# Altium PCB rp3a0-mini.PcbDoc
Units mm, origin at the board's own origin, x right, y up, seen from the top; angles counter-clockwise.
Board outline 60 x 21 mm, 6 copper layers (Top Layer, Mid Layer 1, Mid Layer 2, Mid Layer 3, Mid Layer 4, Bottom Layer), stack 1.597 mm thick; 65 components, 88 nets, 627 pads, 99 vias.
Unrouted connection lines stored in the file: 167.
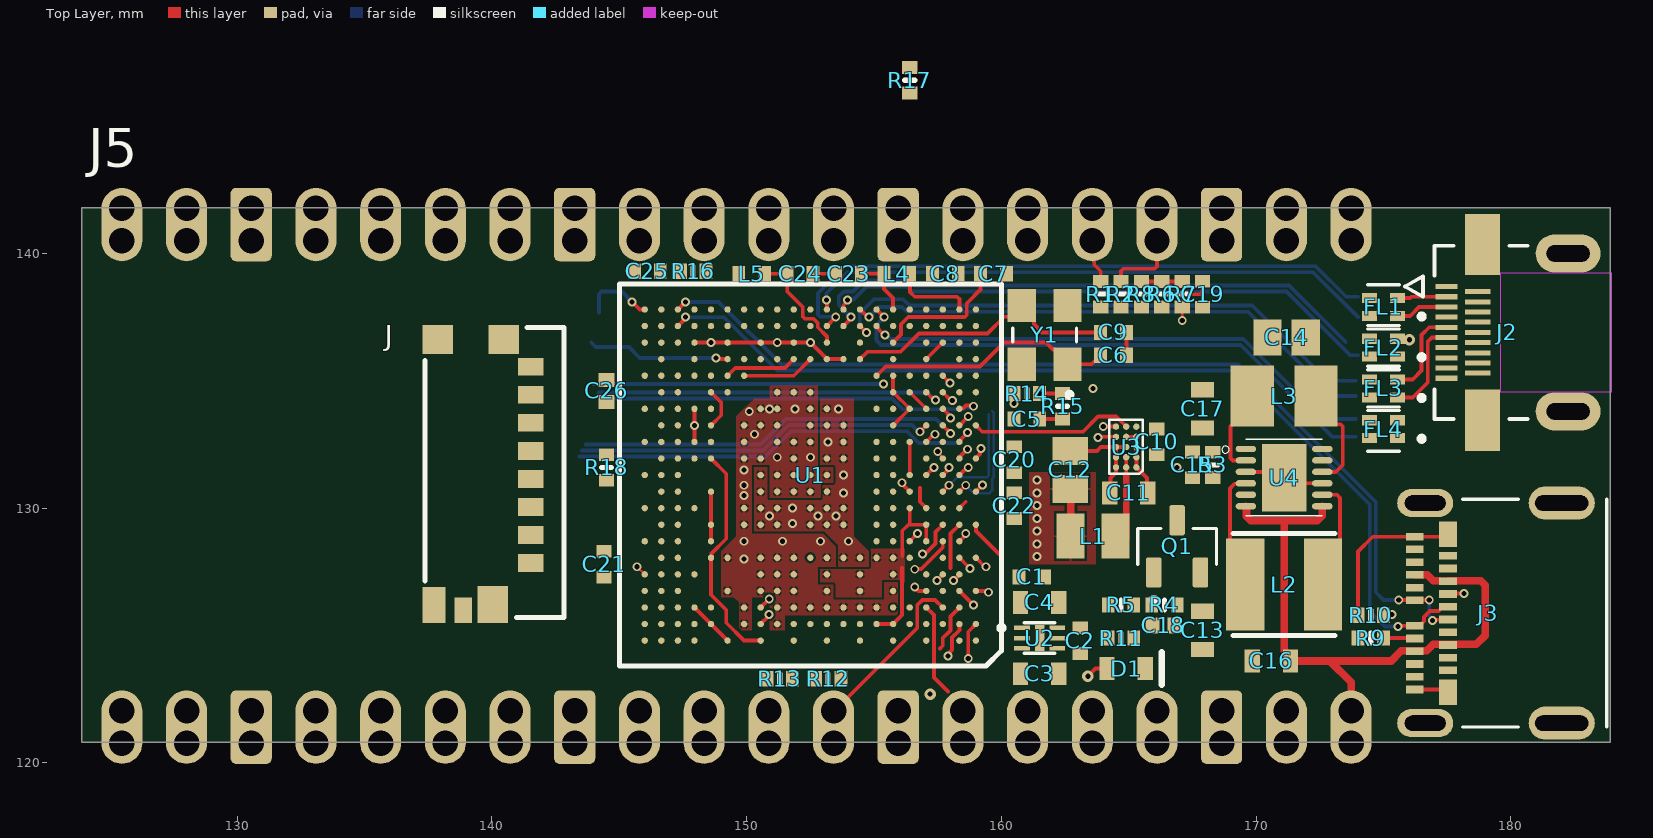
[diagram p0: Top Layer view]
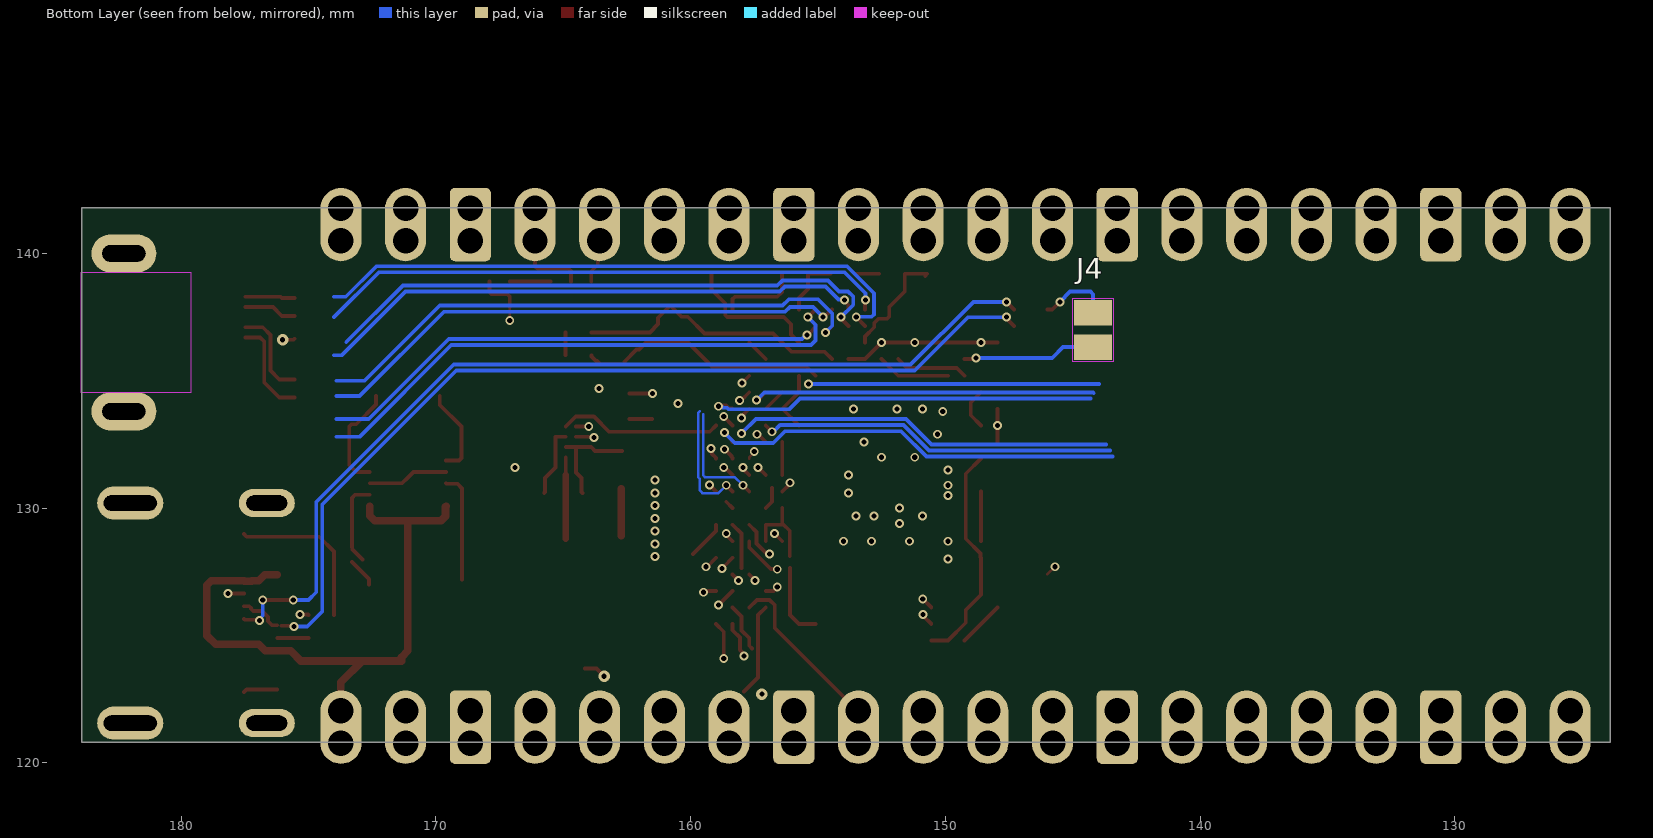
[diagram p1: Bottom Layer view, seen from below]
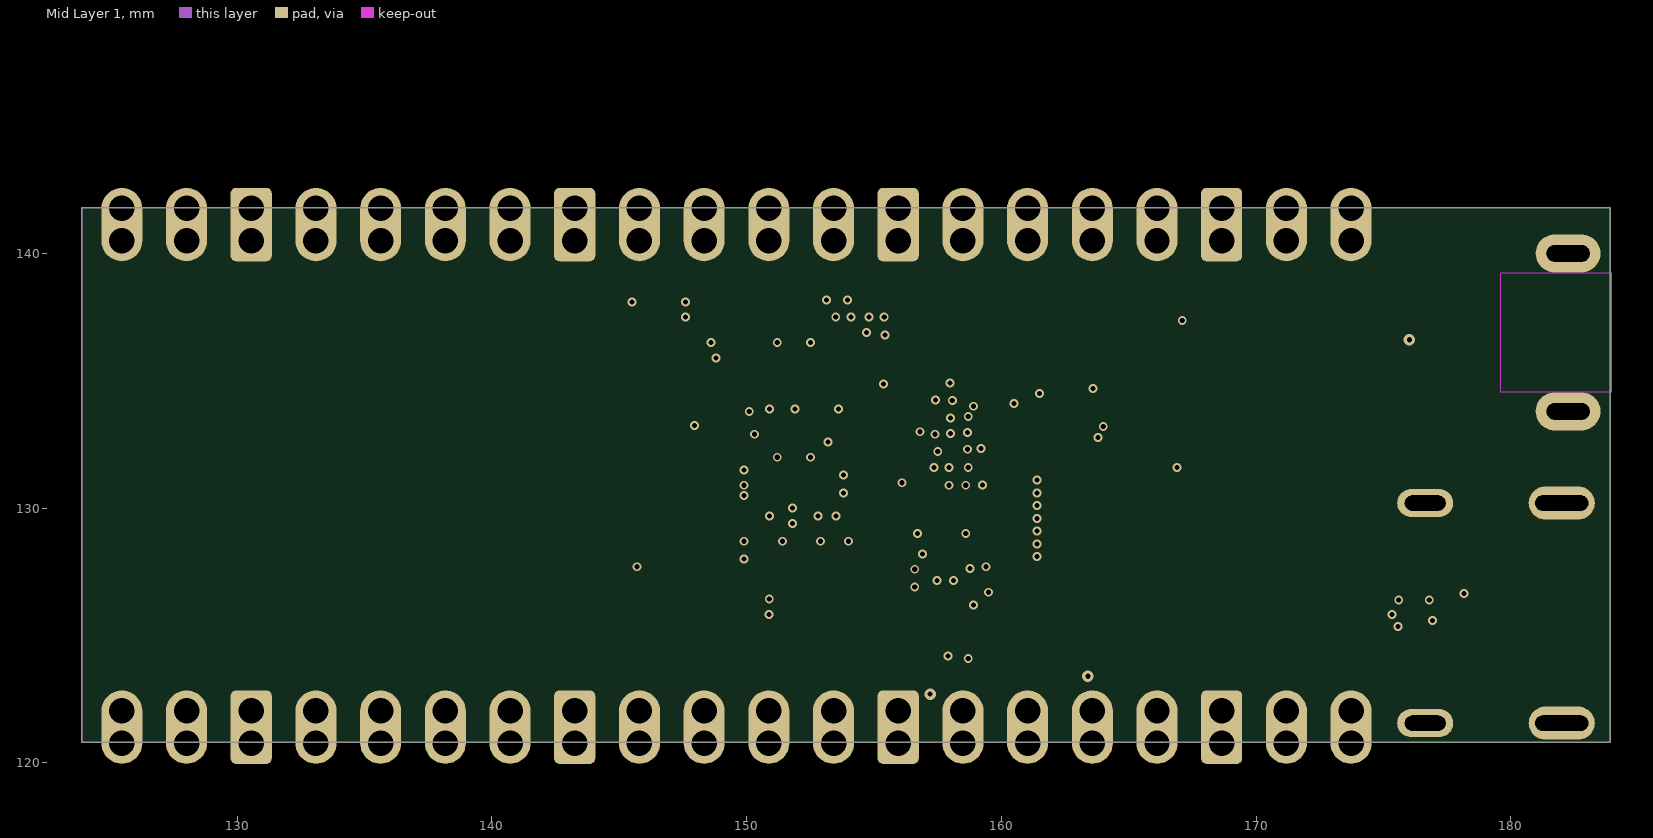
[diagram p2: Mid Layer 1]
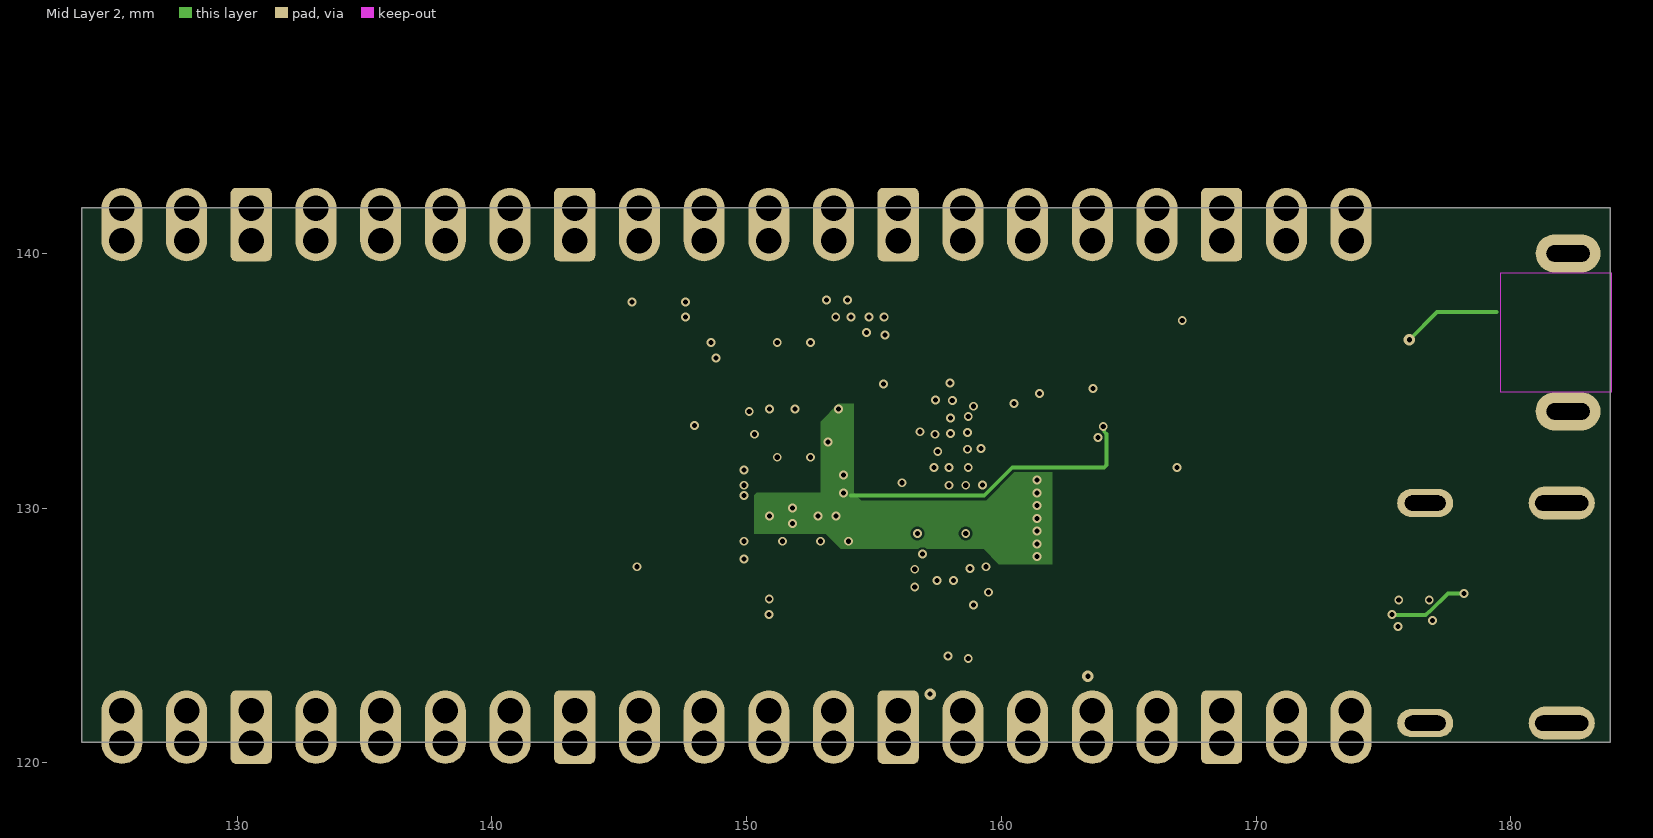
[diagram p3: Mid Layer 2]
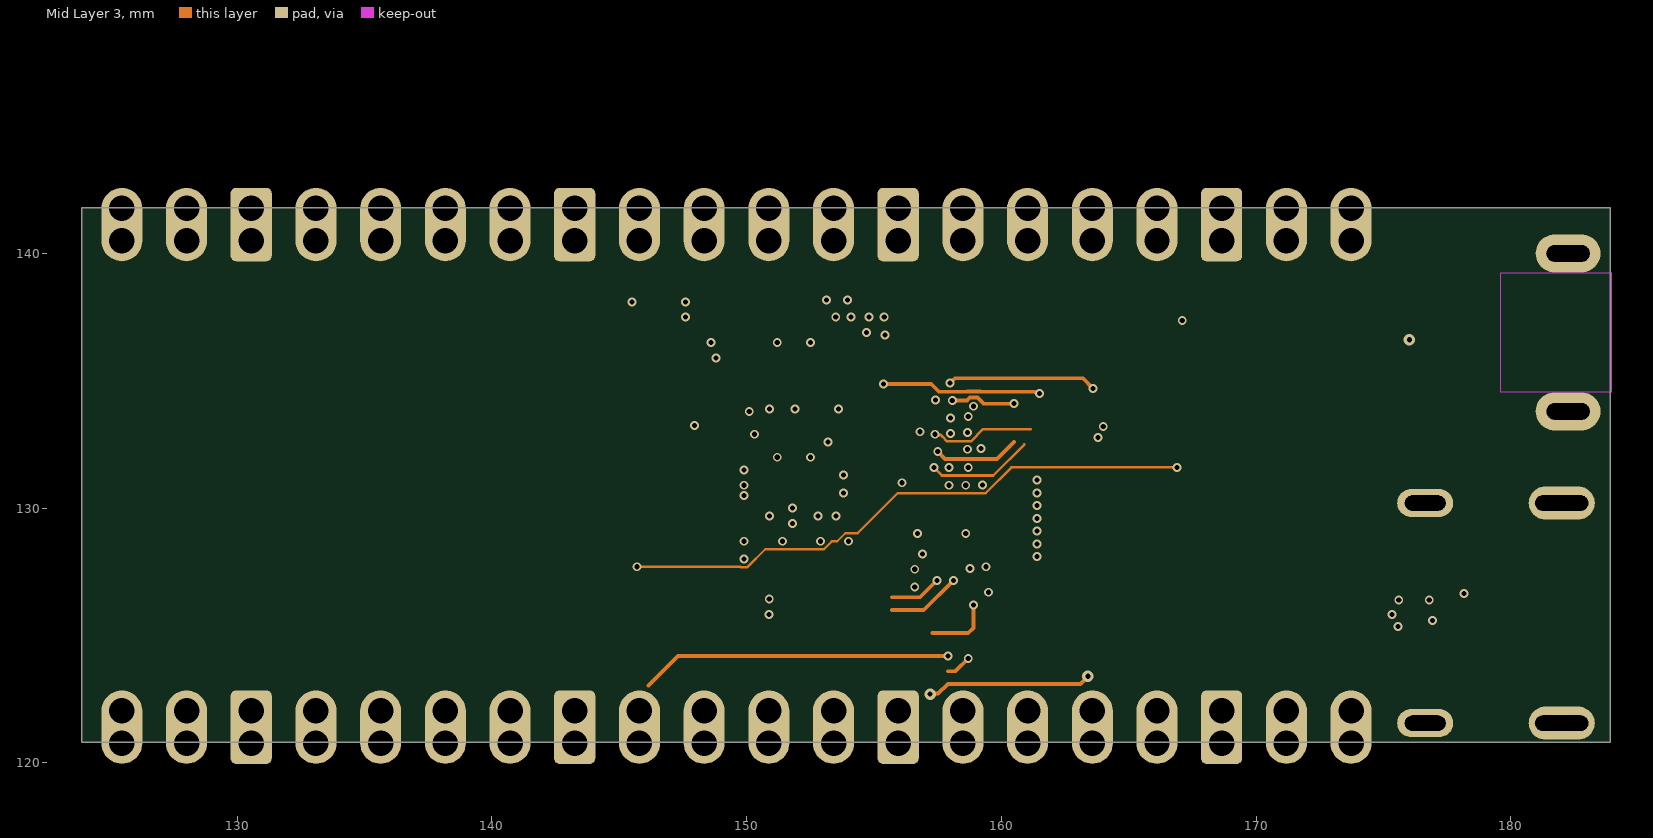
[diagram p4: Mid Layer 3]
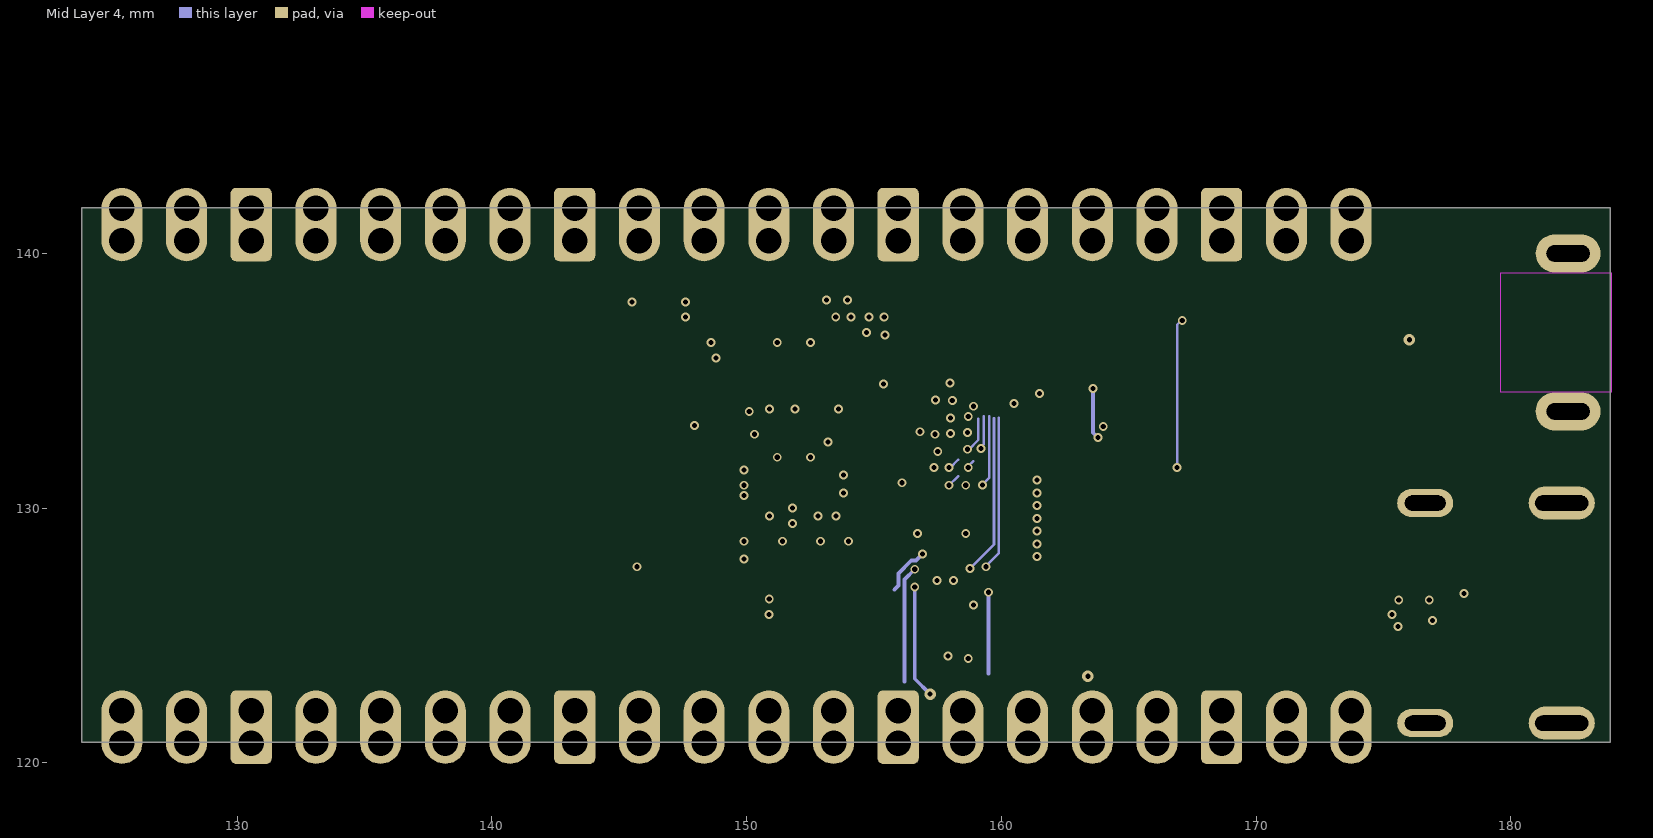
[diagram p5: Mid Layer 4]

## Layer stack, top to bottom
Top Solder: solder mask 0.0127, Solder Resist, Dk 3.8
Top Layer: signal copper 0.035
Dielectric 1: prepreg 0.1, 2313, Dk 4.05
Mid Layer 1: signal copper 0.0175
Core 1: core 0.565, FR-4, Dk 4.5
Mid Layer 2: signal copper 0.0175
Dielectric 2: prepreg 0.127, 2116, Dk 4.25
Mid Layer 3: signal copper 0.0175
Core 2: core 0.565, FR-4, Dk 4.5
Mid Layer 4: signal copper 0.0175
Dielectric 3: prepreg 0.1, 2313, Dk 4.05
Bottom Layer: signal copper 0.035
Bottom Solder: solder mask 0.0127, Solder Resist, Dk 3.8

## Board outline
123.9,120.8 123.9,141.8 183.9,141.8 183.9,120.8

## Design rules (kind name [scope] priority, off if disabled: settings)
BoardOutlineClearance [All] p1: gap=0.2 ignorepadtopadclearanceinfootprint=FALSE
Clearance [All] p1: gap=0.089 ignorepadtopadclearanceinfootprint=FALSE except(0.127: Arc-Hole Track-Hole SMDPad-Via SMDPad-Hole THPad-Via THPad-Hole Via-Text Via-Hole Fill-Hole Poly-Hole Region-Hole Text-Hole)
ComponentClearance ComponentClearance_pico_pads [HasFootprint('PICO_PADS')] p1: gap=0 collisioncheckmode=3 verticalgap=2540 showdistances=FALSE donotcheckwithout3dbody=TRUE
ComponentClearance [All] p2: gap=0.089 collisioncheckmode=3 verticalgap=0.089 showdistances=TRUE
DiffPairsRouting [All] p1: maxlimit=0.089 minlimit=0.089 mostfreqgap=0.089 toplayer_minwidth=0.089 toplayer_maxwidth=1816.048 toplayer_prefwidth=0.089 midlayer1_minwidth=0.089 midlayer1_maxwidth=1816.048 midlayer1_prefwidth=0.089 midlayer2_minwidth=0.089 midlayer2_maxwidth=1816.048 midlayer2_prefwidth=0.089 midlayer3_minwidth=0.089 midlayer3_maxwidth=1816.048 midlayer3_prefwidth=0.089 midlayer4_minwidth=0.089 midlayer4_maxwidth=1816.048 midlayer4_prefwidth=0.089 bottomlayer_minwidth=0.089 bottomlayer_maxwidth=1816.048 bottomlayer_prefwidth=0.089 maxuncoupledlength=12.7
Height [All] p1: minheight=0 maxheight=1816.048 prefheight=12.7
HoleSize [All] p1: absolutevalues=TRUE maxlimit=6.3 minlimit=0.2 maxpercent=80.000 minpercent=20.000
HoleToHoleClearance [All] p1: gap=0.25 allowstackedmicrovias=FALSE
MinimumAnnularRing [All] p1: minimumring=0.076
MinimumSolderMaskSliver [All] p1: minsoldermaskwidth=0
PlaneClearance [All] p1: clearance=0.089
PlaneConnect PlaneConnectPowerPads [InPadClass('PowerPads')] p1: planeconnectstyle=Direct reliefexpansion=0.508 reliefentries=4 reliefconductorwidth=0.254 reliefairgap=0.254
PlaneConnect [All] p2: pad.planeconnectstyle=Relief pad.reliefexpansion=0.3 pad.reliefentries=4 pad.reliefconductorwidth=0.089 pad.reliefairgap=0.089 via.planeconnectstyle=Direct via.reliefexpansion=0.3 via.reliefentries=4 via.reliefconductorwidth=0.127 via.reliefairgap=0.127
PolygonConnect PolygonConnectPowerPads [All vs (InPadClass('PowerPads'))] p1: connectstyle=Direct reliefconductorwidth=0.254 reliefentries=4 polygonreliefangle="90 Angle" airgapwidth=0.254
PolygonConnect [All] p2: thpad.connectstyle=Relief thpad.reliefconductorwidth=0.089 thpad.reliefentries=4 thpad.polygonreliefangle="90 Angle" thpad.airgapwidth=0.089 smdpad.connectstyle=Relief smdpad.reliefconductorwidth=0.089 smdpad.reliefentries=4 smdpad.polygonreliefangle="90 Angle" smdpad.airgapwidth=0.089 via.connectstyle=Direct via.reliefconductorwidth=0.127 via.reliefentries=4 via.polygonreliefangle="90 Angle" via.airgapwidth=0.127
RoutingVias [All] p1: holewidth=0.2 width=0.35 viastyle="Through Hole" minholewidth=0.2 minwidth=0.3 maxholewidth=6.3 maxwidth=6.55
SilkToSilkClearance [All] p1: silktosilkclearance=0
SilkToSolderMaskClearance [IsPad] p1: minsilkscreentomaskgap=0.089 clearancetoexposedcopper=TRUE
SolderMaskExpansion [All] p1: expansion=0.075 istentingtop=FALSE
SupplyNets "Schematic Supply Nets_6" [InNet('DDR_1V25')] p1: voltage=0.000
SupplyNets "Schematic Supply Nets_5" [InNet('VDD_CORE')] p2: voltage=0.000
SupplyNets "Schematic Supply Nets_4" [InNet('1V8')] p3: voltage=0.000
SupplyNets "Schematic Supply Nets_3" [InNet('5V_CORE')] p4: voltage=0.000
SupplyNets "Schematic Supply Nets_2" [InNet('GND')] p5: voltage=0.000
SupplyNets "Schematic Supply Nets_1" [InNet('5V')] p6: voltage=0.000
SupplyNets "Schematic Supply Nets" [InNet('3V3')] p7: voltage=0.000
Width [All] p1: maxlimit=1816.048 minlimit=0.089 preferedwidth=0.089
20 further rules are at their usual default settings.

## Classes and differential pairs
component class rp3a0-mini-misc: C22 C25 C26 D1 R11 R12 R13 R16 R17 R18
component class rp3a-mini-power: C2 C3 C4 C5 C6 C7 C8 C9 C10 C11 C12 C13 C14 C15 C16 C17 C18 C19 C20 C21 C23 C24 L1 L2 L3 L4 L5 Q1 R3 R4 R5 R6 R7 R8 U1 U2 U3 U4 Y1
component class rp3a0-mini-wireless-sd: J R14 R15
component class rp3a0-mini-hdmi: FL1 FL2 FL3 FL4 J2 J3 J4 R9 R10
component class rp3a0-mini-gpio: C1 J5 R1 R2

## Components (designator, comment, footprint, x,y, rotation, side; value= is the part's Value field where it differs from the comment)
C1 "Cap" 0402 161.2,127.3 r180 top value=220n
C2 "Cap" 0402 163.1,124.8 r270 top value=220n
C3 "Cap" 0603 161.5,123.5 r180 top value=10u
C4 "Cap" 0603 161.5,126.3 r180 top value=10u
C5 "Cap" 0402 161,133.5 r180 top value=220n
C6 "Cap" 0402 164.4,136 r0 top value=18p
C7 "Cap" 0402 159.692,139.2 r180 top value=1u
C8 "Cap" 0402 157.8,139.2 r0 top value=220n
C9 "Cap" 0402 164.4,136.9 r0 top value=18p
C10 "Cap" 0402 166.1,132.6 r270 top value=1u
C11 "Cap" 0603 165,130.6 r0 top value=10u
C12 "Cap" "C0805 NP" 162.7,131.5 r270 top value=47u
C13 "Cap" 0603 167.9,125.2 r90 top value=10u
C14 "Cap" "C0805 NP" 171.2,136.7 r0 top value=47u
C15 "Cap" 0402 167.5,131.7 r270 top value=100n
C16 "Cap" 0603 170.6,124 r0 top value=10u
C17 "Cap" 0603 167.9,133.9 r270 top value=10u
C18 "Cap" CAPC1005X60N 166.365,125.4 r0 top value=220n
C19 "Cap" 0402 167.9,138.4 r90 top value=100n
C20 "Cap" 0402 160.5,131.9 r90 top value=220n
C21 "Cap" 0402 144.4,127.8 r90 top value=220n
C22 "Cap" 0402 160.5,130.1 r90 top value=220nF
C23 "Cap" 0402 154,139.2 r0 top value=220n
C24 "Cap" 0402 152.1,139.2 r180 top value=220n
C25 "Cap" 0402 146.1,139.3 r0 top value=?
C26 "Cap" CAPC1005X60N 144.5,134.6 r90 top value=220n
D1 "SMD_LED" LED_0603 164.9,123.7 r180 top
FL1 "EXC-24CG900U" FIL_EXC24CB102U 175,137.9 r180 top
FL2 "EXC-24CG900U" FIL_EXC24CB102U 175,136.3 r180 top
FL3 "EXC-24CG900U" FIL_EXC24CB102U 175,134.7 r180 top
FL4 "EXC-24CG900U" FIL_EXC24CB102U 175,133.1 r180 top
J "0475710001" MOLEX_0475710001 140.1,131.4 r270 top locked
J2 "467652301" MOLEX_467652301 183.95,136.9 r90 top
J3 "105450-0101" MOLEX_105450-0101 180,125.88 r90 top
J4 "SOLDER_PAD_OPEN" SOLDER_PAD_OPEN 144.2,137 r90 bottom net-tie
J5 "pico-pads" PICO_PADS 175,141.77 r270 top locked
L1 "INDUCTOR" INDC2016X100N 163.6,128.9 r180 top value=100uH
L2 "INDUCTOR" INDP4040X180N 171.1,127 r180 top value=4.7uH
L3 "INDUCTOR" INDP2622X120N 171.1,134.4 r0 top value=2.2uH
L4 "INDUCTOR" 0402 155.9,139.2 r0 top value=100uH
L5 "INDUCTOR" 0402 150.2,139.2 r180 top value=100uH
Q1 "DMG2305UX-7" SOT91P240X110-3N_DMG2305UX-7 166.9,128.5 r90 top
R1 "Res SMD" RES-0402-SML 163.9,138.4 r270 top value=1k8
R2 "Res SMD" RES-0402-SML 164.7,138.4 r270 top value=1k8
R3 "Res SMD" RES-0402-SML 168.3,131.7 r90 top value=100k
R4 "Res SMD" RES-0402-SML 166.4,126.2 r0 top value=470k
R5 "Res SMD" RES-0402-SML 164.7,126.2 r180 top value=82k
R6 "Res SMD" RES-0402-SML 166.3,138.4 r270 top value=10k
R7 "Res SMD" RES-0402-SML 167.1,138.4 r270 top value=47k
R8 "Res SMD" RES-0402-SML 165.5,138.4 r90 top value=18k
R9 "Res SMD" RES-0402-SML 174.5,124.9 r0 top value=5.1k
R10 "Res SMD" RES-0402-SML 174.5,125.8 r0 top value=5.1k
R11 "Res SMD" RES-0402-SML 164.7,124.9 r0 top value=470R
R12 "Res SMD" RES-0402-SML 153.2,123.3 r180 top value=240R
R13 "Res SMD" RES-0402-SML 151.3,123.3 r180 top value=240R
R14 "Res SMD" RES-0402-SML 161,134.5 r180 top value=33R
R15 "Res SMD" RES-0402-SML 162.4,134 r90 top value=47k
R16 "Res SMD" RES-0402-SML 147.9,139.3 r180 top value=3.9k
R17 "Res SMD" RES-0402-SML 156.4,146.8 r90 top value=1K
R18 "Res SMD" RES-0402-SML 144.5,131.6 r270 top value=240R
U1 "RP3A0" RP3A0-BGA 159,124.8 r180 top locked
U2 "RT9081A-1BGQZA(2)" VREG_RT9081A_1BGQZA(2) 161.5,124.9 r270 top
U3 "RT8088AWSC" 15B_WLCSP_1.31X2.11 165.3,131.6 r180 top
U4 "PAM2306AYPKE" SON45P300X300X80-13N 171.1,131.2 r0 top
Y1 "ECS-192-18-33-JGN-TR" XTAL_ECS-192-18-33-JGN-TR 161.7,136.8 r90 top

## Footprints (in the part's own frame and the unit in brackets; to place one, negate y for a bottom-side part, rotate by r counter-clockwise, add the part's x,y. Pads: shape width x height; smd on the part's side, far side on the other; paste and mask are expansions set on the pad)
15B_WLCSP_1.31X2.11 [mm]
  round 0.25 smd mask+0.05: A1(0,0) A2(0.4,0) A3(0.8,0) B1(0,-0.4) B2(0.4,-0.4) B3(0.8,-0.4) C1(0,-0.8) C2(0.4,-0.8) C3(0.8,-0.8) D1(0,-1.2) D2(0.4,-1.2) D3(0.8,-1.2) E1(0,-1.6) E2(0.4,-1.6) E3(0.8,-1.6)
  silkscreen extent -0.25,-1.87 1.06,0.25, body extent -0.26,-1.86 1.05,0.26, height 0.55
0402 [mm] "Chip Resistor, Body 1.0x0.5mm, IPC High Density"
  rect 0.5x0.6 smd: 1(-0.508,0) 2(0.508,0)
  body extent -0.55,-0.25 0.55,0.25, height 0.51
0603 [mm] "Chip Resistor, Body 0.6x0.3mm, IPC High Density"
  rect 0.6x0.9 smd: 1(-0.75,0) 2(0.75,0)
  body extent -0.74,-0.43 0.76,0.43, height 0.55
"C0805 NP" [mm] "Chip Capacitor, Body 2.0x1.3mm, IPC High Density"
  rect 1.1x1.4 smd: 1(-0.75,0) 2(0.75,0)
  body extent -1.1,-0.72 1.1,0.72, height 1.4
CAPC1005X60N [mm]
  rect 0.56x0.63 smd: 1(-0.435,0) 2(0.435,0)
FIL_EXC24CB102U [mm]
  rect 0.6x0.4 smd: 1(-0.55,0.35) 2(-0.55,-0.35) 3(0.55,-0.35) 4(0.55,0.35)
  silkscreen extent -1.6,-0.87 0.63,0.87, body extent -0.63,-0.5 0.63,0.5, height 0.6
INDC2016X100N [mm] "Inductor 0806 (based on muRata LQM2MPN2R2NG0L)"
  rect 1.1x1.77 smd: 1(-0.885,0) 2(0.885,0)
INDP2622X120N [mm]
  rect 1.7x2.4 smd: 1(-1.25,0) 2(1.25,0)
INDP4040X180N [mm]
  rect 1.5x3.6 smd: 1(-1.525,0) 2(1.525,0)
  silkscreen extent -2,-2 2,2, body extent -2.2,-2 2.2,2, height 1.83
LED_0603 [mm] "SMD LED 0603"
  rect 0.6x0.9 smd: 1(-0.75,0) 2(0.75,0)
  silkscreen extent -1.4,-0.64 -1.4,0.63, body extent -0.74,-0.43 0.76,0.43, height 0.55
MOLEX_105450-0101 [mm]
  rect 0.3x0.7 smd: A1(-3,3.77) A2(-2.5,3.77) A3(-2,3.77) A4(-1.5,3.77) A5(-1,3.77) A6(-0.5,3.77) A7(0.5,3.77) A8(1,3.77) A9(1.5,3.77) A10(2,3.77) A11(2.5,3.77) A12(3,3.77) B2(2.25,2.47) B3(1.75,2.47) B4(1.25,2.47) B5(0.75,2.47) B6(0.25,2.47) B7(-0.25,2.47) B8(-0.75,2.47) B9(-1.25,2.47) B10(-1.75,2.47) B11(-2.25,2.47)
  rect 1x0.7 smd: B1(3.1,2.47) B12(-3.1,2.47)
  oval 1.1x2.2 hole 0.6 slot 1.6 at 90 deg: S1(-4.32,3.36) S2(4.32,3.36)
  oval 1.3x2.6 hole 0.6 slot 2.1 at 90 deg: S3(-4.32,-2) S4(4.32,-2)
  silkscreen extent -4.47,-3.77 4.47,1.9, body extent -4.47,-3.94 4.47,3.96, height 3.16
MOLEX_467652301 [mm]
  rect 0.198x0.85 smd mask+0.064: 1(1.8,6.475) 3(1.4,6.475) 5(1,6.475) 7(0.6,6.475) 9(0.2,6.475) 11(-0.2,6.475) 13(-0.6,6.475) 15(-1,6.475) 17(-1.4,6.475) 19(-1.8,6.475)
  rect 0.198x1 smd mask+0.064: 2(1.6,5.25) 4(1.2,5.25) 6(0.8,5.25) 8(0.4,5.25) 10(0,5.25) 12(-0.4,5.25) 14(-0.8,5.25) 16(-1.2,5.25) 18(-1.6,5.25)
  rect 2.4x1.38 smd mask+0.064: SH1(-3.45,5.06) SH4(3.45,5.06)
  oval 1.5x2.55 hole 0.65 slot 1.7 at 90 deg mask+0.064: SH2(-3.1,1.7) SH3(3.1,1.7)
  Keep-Out Layer region: 2.35,0 -2.35,0 -2.35,4.34 2.35,4.34
  silkscreen extent -3.4,3.3 3.4,8.1, body extent -4.45,-0.7 4.45,6.8, height 2.97
MOLEX_0475710001 [mm]
  rect 0.7x1 smd: 1(3.55,1.415) 2(2.45,1.415) 3(1.35,1.415) 4(0.25,1.415) 5(-0.85,1.415) 6(-1.95,1.415) 7(-3.05,1.415) 8(-4.15,1.415)
  rect 1.15x1.2 smd: 9(-5.225,0.365) 10(-5.225,-2.225)
  rect 1.4x0.9 smd: 11(5.2,-2.375)
  rect 1x0.7 smd: 12(5.4,-1.225)
  rect 1.45x1.2 smd: 13(5.175,-0.075)
  silkscreen extent -5.7,-2.73 5.7,2.73, body extent -5.7,-2.7 5.7,2.75, height 2.31
PICO_PADS [mil]
  oval 113.5x63.5 hole 39.37 copper offset 25,0: 1(0,-50) 2(0,-150) 4(0,-350) 5(0,-450) 6(0,-550) 7(0,-650) 9(0,-850) 10(0,-950) 11(0,-1050) 12(0,-1150) 14(0,-1350) 15(0,-1450) 16(0,-1550) 17(0,-1650) 19(0,-1850) 20(0,-1950) 21(776.77,-1950) 22(776.77,-1850) 24(776.77,-1650) 25(776.77,-1550) 26(776.77,-1450) 27(776.77,-1350) 29(776.77,-1150) 30(776.77,-1050) 31(776.77,-950) 32(776.77,-850) 34(776.77,-650) 35(776.77,-550) 36(776.77,-450) 37(776.77,-350) 39(776.77,-150) 40(776.77,-50)
  oval 113.5x63.5 hole 39.37 copper offset -25,0: 1(50,-50) 2(50,-150) 4(50,-350) 5(50,-450) 6(50,-550) 7(50,-650) 9(50,-850) 10(50,-950) 11(50,-1050) 12(50,-1150) 14(50,-1350) 15(50,-1450) 16(50,-1550) 17(50,-1650) 19(50,-1850) 20(50,-1950) 21(826.77,-1950) 22(826.77,-1850) 24(826.77,-1650) 25(826.77,-1550) 26(826.77,-1450) 27(826.77,-1350) 29(826.77,-1150) 30(826.77,-1050) 31(826.77,-950) 32(826.77,-850) 34(826.77,-650) 35(826.77,-550) 36(826.77,-450) 37(826.77,-350) 39(826.77,-150) 40(826.77,-50)
  rrect25% 113.5x63.5 hole 39.37 copper offset 25,0: 3(0,-250) 8(0,-750) 13(0,-1250) 18(0,-1750) 23(776.77,-1750) 28(776.77,-1250) 33(776.77,-750) 38(776.77,-250)
  rrect25% 113.5x63.5 hole 39.37 copper offset -25,0: 3(50,-250) 8(50,-750) 13(50,-1250) 18(50,-1750) 23(826.77,-1750) 28(826.77,-1250) 33(826.77,-750) 38(826.77,-250)
RES-0402-SML [mm] "Resistor 0402 small footprint"
  rect 0.5x0.6 smd: 1(-0.5,0) 2(0.5,0)
  silkscreen extent 0,-0.2 0,0.2, body extent -0.51,-0.25 0.51,0.25, height 0.35
RP3A0-BGA [mm]
  round 0.25 smd: A1(0,0) A2(0.65,0) A4(1.95,0) A6(3.25,0) A8(4.55,0) A10(5.85,0) A12(7.15,0) A14(8.45,0) A16(9.75,0) A18(11.05,0) A19(11.7,0) A20(12.35,0) A21(13,0) AA1(0,-13) AA2(0.65,-13) AA3(1.3,-13) AA4(1.95,-13) AA5(2.6,-13) AA6(3.25,-13) AA7(3.9,-13) AA8(4.55,-13) AA9(5.2,-13) AA10(5.85,-13) AA11(6.5,-13) AA12(7.15,-13) AA13(7.8,-13) AA14(8.45,-13) AA15(9.1,-13) AA16(9.75,-13) AA17(10.4,-13) AA18(11.05,-13) AA19(11.7,-13) AA20(12.35,-13) AA21(13,-13) B1(0,-0.65) B2(0.65,-0.65) B3(1.3,-0.65) B4(1.95,-0.65) B5(2.6,-0.65) B6(3.25,-0.65) B7(3.9,-0.65) B8(4.55,-0.65) B9(5.2,-0.65) B10(5.85,-0.65) B11(6.5,-0.65) B12(7.15,-0.65) B13(7.8,-0.65) B14(8.45,-0.65) B15(9.1,-0.65) B17(10.4,-0.65) B18(11.05,-0.65) B19(11.7,-0.65) B20(12.35,-0.65) B21(13,-0.65) C2(0.65,-1.3) C3(1.3,-1.3) C4(1.95,-1.3) C5(2.6,-1.3) C6(3.25,-1.3) C7(3.9,-1.3) C8(4.55,-1.3) C9(5.2,-1.3) C10(5.85,-1.3) C11(6.5,-1.3) C12(7.15,-1.3) C13(7.8,-1.3) C14(8.45,-1.3) C15(9.1,-1.3) C17(10.4,-1.3) C18(11.05,-1.3) C19(11.7,-1.3) C20(12.35,-1.3) C21(13,-1.3) D1(0,-1.95) D2(0.65,-1.95) D3(1.3,-1.95) D4(1.95,-1.95) D6(3.25,-1.95) D8(4.55,-1.95) D10(5.85,-1.95) D12(7.15,-1.95) D13(7.8,-1.95) D14(8.45,-1.95) D16(9.75,-1.95) D19(11.7,-1.95) D20(12.35,-1.95) D21(13,-1.95) E2(0.65,-2.6) E3(1.3,-2.6) E4(1.95,-2.6) E6(3.25,-2.6) E8(4.55,-2.6) E10(5.85,-2.6) E12(7.15,-2.6) E13(7.8,-2.6) E14(8.45,-2.6) E18(11.05,-2.6) E19(11.7,-2.6) E20(12.35,-2.6) E21(13,-2.6) F1(0,-3.25) F2(0.65,-3.25) F3(1.3,-3.25) F5(2.6,-3.25) F6(3.25,-3.25) F7(3.9,-3.25) F8(4.55,-3.25) F9(5.2,-3.25) F10(5.85,-3.25) F11(6.5,-3.25) F12(7.15,-3.25) F13(7.8,-3.25) F14(8.45,-3.25) F16(9.75,-3.25) F17(10.4,-3.25) F19(11.7,-3.25) F20(12.35,-3.25) G2(0.65,-3.9) G3(1.3,-3.9) G4(1.95,-3.9) G5(2.6,-3.9) G6(3.25,-3.9) G7(3.9,-3.9) G17(10.4,-3.9) G19(11.7,-3.9) G20(12.35,-3.9) G21(13,-3.9) H1(0,-4.55) H2(0.65,-4.55) H3(1.3,-4.55) H4(1.95,-4.55) H6(3.25,-4.55) H7(3.9,-4.55) H9(5.2,-4.55) H10(5.85,-4.55) H11(6.5,-4.55) H13(7.8,-4.55) H14(8.45,-4.55) H15(9.1,-4.55) H17(10.4,-4.55) H19(11.7,-4.55) H20(12.35,-4.55) J2(0.65,-5.2) J3(1.3,-5.2) J4(1.95,-5.2) J5(2.6,-5.2) J6(3.25,-5.2) J7(3.9,-5.2) J9(5.2,-5.2) J10(5.85,-5.2) J11(6.5,-5.2) J13(7.8,-5.2) J14(8.45,-5.2) J15(9.1,-5.2) J18(11.05,-5.2) J19(11.7,-5.2) J20(12.35,-5.2) J21(13,-5.2) K1(0,-5.85) K2(0.65,-5.85) K3(1.3,-5.85) K5(2.6,-5.85) K6(3.25,-5.85) K7(3.9,-5.85) K10(5.85,-5.85) K11(6.5,-5.85) K12(7.15,-5.85) K13(7.8,-5.85) K14(8.45,-5.85) K17(10.4,-5.85) K19(11.7,-5.85) K20(12.35,-5.85) L2(0.65,-6.5) L3(1.3,-6.5) L4(1.95,-6.5) L5(2.6,-6.5) L6(3.25,-6.5) L7(3.9,-6.5) L10(5.85,-6.5) L11(6.5,-6.5) L12(7.15,-6.5) L13(7.8,-6.5) L14(8.45,-6.5) L19(11.7,-6.5) L20(12.35,-6.5) L21(13,-6.5) M1(0,-7.15) M2(0.65,-7.15) M3(1.3,-7.15) M4(1.95,-7.15) M6(3.25,-7.15) M7(3.9,-7.15) M9(5.2,-7.15) M10(5.85,-7.15) M12(7.15,-7.15) M14(8.45,-7.15) M15(9.1,-7.15) M17(10.4,-7.15) M18(11.05,-7.15) M19(11.7,-7.15) M20(12.35,-7.15) N2(0.65,-7.8) N3(1.3,-7.8) N4(1.95,-7.8) N5(2.6,-7.8) N6(3.25,-7.8) N7(3.9,-7.8) N9(5.2,-7.8) N11(6.5,-7.8) N12(7.15,-7.8) N13(7.8,-7.8) N15(9.1,-7.8) N17(10.4,-7.8) N18(11.05,-7.8) N19(11.7,-7.8) N20(12.35,-7.8) N21(13,-7.8) P1(0,-8.45) P2(0.65,-8.45) P3(1.3,-8.45) P4(1.95,-8.45) P6(3.25,-8.45) P9(5.2,-8.45) P10(5.85,-8.45) P11(6.5,-8.45) P13(7.8,-8.45) P14(8.45,-8.45) P15(9.1,-8.45) P17(10.4,-8.45) P19(11.7,-8.45) P20(12.35,-8.45) R2(0.65,-9.1) R3(1.3,-9.1) R4(1.95,-9.1) R5(2.6,-9.1) R6(3.25,-9.1) R7(3.9,-9.1) R10(5.85,-9.1) R11(6.5,-9.1) R13(7.8,-9.1) R14(8.45,-9.1) R17(10.4,-9.1) R18(11.05,-9.1) R19(11.7,-9.1) R20(12.35,-9.1) R21(13,-9.1) T1(0,-9.75) T2(0.65,-9.75) T3(1.3,-9.75) T4(1.95,-9.75) T5(2.6,-9.75) T6(3.25,-9.75) T11(6.5,-9.75) T12(7.15,-9.75) T13(7.8,-9.75) T16(9.75,-9.75) T17(10.4,-9.75) T19(11.7,-9.75) T20(12.35,-9.75) U1(0,-10.4) U2(0.65,-10.4) U3(1.3,-10.4) U4(1.95,-10.4) U5(2.6,-10.4) U6(3.25,-10.4) U7(3.9,-10.4) U15(9.1,-10.4) U16(9.75,-10.4) U17(10.4,-10.4) U18(11.05,-10.4) U19(11.7,-10.4) U20(12.35,-10.4) U21(13,-10.4) V1(0,-11.05) V2(0.65,-11.05) V4(1.95,-11.05) V6(3.25,-11.05) V8(4.55,-11.05) V9(5.2,-11.05) V10(5.85,-11.05) V11(6.5,-11.05) V12(7.15,-11.05) V13(7.8,-11.05) V14(8.45,-11.05) V15(9.1,-11.05) V16(9.75,-11.05) V18(11.05,-11.05) V20(12.35,-11.05) W1(0,-11.7) W2(0.65,-11.7) W3(1.3,-11.7) W4(1.95,-11.7) W6(3.25,-11.7) W8(4.55,-11.7) W10(5.85,-11.7) W12(7.15,-11.7) W14(8.45,-11.7) W16(9.75,-11.7) W18(11.05,-11.7) W19(11.7,-11.7) W20(12.35,-11.7) W21(13,-11.7) Y1(0,-12.35) Y2(0.65,-12.35) Y3(1.3,-12.35) Y4(1.95,-12.35) Y5(2.6,-12.35) Y6(3.25,-12.35) Y7(3.9,-12.35) Y8(4.55,-12.35) Y9(5.2,-12.35) Y10(5.85,-12.35) Y11(6.5,-12.35) Y12(7.15,-12.35) Y13(7.8,-12.35) Y14(8.45,-12.35) Y15(9.1,-12.35) Y16(9.75,-12.35) Y17(10.4,-12.35) Y18(11.05,-12.35) Y19(11.7,-12.35) Y20(12.35,-12.35) Y21(13,-12.35)
  silkscreen extent -1,-14 14,1, body extent -1,-14 14,1, height 1.2
SOLDER_PAD_OPEN [mm]
  rect 1x1.5 smd paste-2539.97: 1(-0.675,0) 2(0.675,0)
  Top Layer keep-out region: -1.25,0.8 1.25,0.8 1.25,-0.8 -1.25,-0.8
SON45P300X300X80-13N [mm]
  oval 0.8x0.25 smd: 1(-1.5,1.125) 2(-1.5,0.675) 3(-1.5,0.225) 4(-1.5,-0.225) 5(-1.5,-0.675) 6(-1.5,-1.125) 7(1.5,-1.125) 8(1.5,-0.675) 9(1.5,-0.225) 10(1.5,0.225) 11(1.5,0.675) 12(1.5,1.125)
  rect 1.75x2.65 smd: 13(0,0)
  silkscreen extent -2.44,-1.5 1.5,1.5, body extent -1.52,-1.52 1.52,1.52, height 0.81
SOT91P240X110-3N_DMG2305UX-7 [mm]
  rrect25% 1.18x0.61 smd: 1(-1.025,0.915) 2(-1.025,-0.915) 3(1.025,0)
  silkscreen extent -2.2,-1.55 0.7,1.55, body extent -1.2,-1.45 1.2,1.45, height 1.14
VREG_RT9081A_1BGQZA(2) [mm]
  rect 0.18x0.62 smd: 1(-0.4,-0.69) 2(0,-0.69) 3(0.4,-0.69) 4(0.4,0.69) 5(0,0.69) 6(-0.4,0.69)
  rect 1.015x0.375 smd: 7(0,0)
  silkscreen extent -0.6,-1.6 0.6,0.6, body extent -0.6,-0.6 0.6,0.6, height 0.3
XTAL_ECS-192-18-33-JGN-TR [mm]
  rect 1.3x1.1 smd: 1(-1.15,-0.9) 2(1.15,-0.9) 3(1.15,0.9) 4(-1.15,0.9)
  silkscreen extent -2.45,-1.25 0.27,1.25, body extent -1.6,-1.25 1.6,1.25, height 0.8

## Part data
C1 C2 C3 C4 C5 C6 C7 C8 C9 C10 C11 C12 C13 C14 C15 C16 C17 C18 C19 C20 C21 C22 C23 C24 C25 C26: library part CAP-NONPOL, "Capacitor"
FL1 FL2 FL3 FL4: "Series/Type: Common mode Filters(for Gbps), Size [LÃ—W] (mm): 1.25Ã—1.0, Height (mm): 0.5, Impedance [Common Mode] (â„", Package="0504 Panasonic", Availability="In Stock", Check_prices=https://www.snapeda.com/parts/EXC24CG900U/Panasonic/view-part/?ref=eda, MF=Panasonic, MP=EXC24CG900U, Price=None, Purchase-URL=https://pricing.snapeda.com/search/part/EXC24CG900U/?ref=eda, SnapEDA_Link=https://www.snapeda.com/parts/EXC24CG900U/Panasonic/view-part/?ref=snap
J: "9 _8 + 1_ Position Card Connector Secure Digital - microSDâ„¢ Surface Mount, Right Angle Gold", Package=None, Availability=Unavailable, MF=Molex, MP=0475710001, Price=None, SnapEDA_Link=https://www.snapeda.com/parts/0475710001/Molex/view-part/424368/?ref=snap
J2: "0.40mm Pitch Micro HDMI Connector, Right-Angle Receptacle, Surface Mount, Hybrid Type Mount, with Pick-and-Place Polyimide Tape, 19 Circuits, Lead-Free", Package=None, Check_prices=https://www.snapeda.com/parts/467652301/Molex/view-part/?ref=eda, MF=Molex, MP=467652301, SnapEDA_Link=https://www.snapeda.com/parts/467652301/Molex/view-part/?ref=snap
J3: "USB-C, USB 3.1 Gen 2, Receptacle Connector 24 Position Surface Mount, Right Angle; Through Hole", Package=None, Digi-Key_Part_Number=WM12856CT-ND, Digi-Key_Purchase_URL=https://www.digikey.tw/product-detail/en/molex/1054500101/WM12856CT-ND/5843891?utm_source=snapeda&utm_medium=aggregator&utm_campaign=symbol, MF=Molex, MP=1054500101, SnapEDA_Link=https://www.snapeda.com/parts/1054500101/Molex/view-part/448528/?ref=snap
J4: "Solder pads with no connection"
L1 L2 L3 L4 L5: "Inductor SMD"
Q1: "P-Channel 20V 4.2A _Ta_ 1.4W _Ta_ Surface Mount SOT-23", Package="TO-236-3 Power Analog Micro", Availability=Unavailable, MF="Power Analog Micro", MP=DMG2305UX-7, Price=None, SnapEDA_Link=https://www.snapeda.com/parts/DMG2305UX-7/Power%20Analog%20Micro/view-part/174848/?ref=snap
R1 R2 R3 R4 R5 R6 R7 R8 R9 R10 R11 R12 R13 R14 R15 R16 R17 R18: "Resistor"
U2: "Linear Voltage Regulator IC 1 Output 500mA 6-ZADFN (1.2x1.2)", Package="XFDFN-6 Richtek", Availability="In Stock", Check_prices=https://www.snapeda.com/parts/RT9081AGQZA/Richtek+USA+Inc./view-part/?ref=eda, MF="Richtek USA", MP=RT9081AGQZA, Price=None, SnapEDA_Link=https://www.snapeda.com/parts/RT9081AGQZA/Richtek+USA+Inc./view-part/?ref=snap
U3: "Buck Switching Regulator IC Positive Programmable 0.6V 1 Output 3A 15-UFBGA, WLCSP"
U4: "Buck Switching Regulator IC Positive Fixed 1.8V, 3.3V 2 Output 1A 12-WFDFN Exposed Pad", Package="WFDFN-12 Diodes Inc.", Availability=Unavailable, MF="Diodes Inc.", MP=PAM2306AYPKE, Price=None, SnapEDA_Link=https://www.snapeda.com/parts/PAM2306AYPKE/Diodes%20Inc./view-part/481908/?ref=snap
Y1: "The sub miniature ECX-32 is a compact SMD Crystal. The 3.2 x 2.5 x 0.8 mm ceramic package is ideal for todayâ€™s SMD manufacturing environment.", Package=None, Availability=Unavailable, MP=ECS-192-18-33-JGN-TR, Price=None

## Via types
v1: diameter 0.35, hole 0.2, Top Layer to Bottom Layer, tented both sides, 96 vias
v2: diameter 0.45, hole 0.2, Top Layer to Bottom Layer, tented both sides, 3 vias

## Nets (pads, with @x,y where several pads share a name; then routed paths per layer and width w, separated by ;. In a path a pad name is that pad's centre, name@x,y a point inside that pad or via, vN(x,y) a via of type N, cw(c..) or ccw(c..) an arc to the next point about the centre after c; other vN are vias at no path point)
1V8: C3.2 C5.2 C14.2 L3.2 L4.2 U1.AA2 U1.B14 U1.D21 U1.J3 U1.R4 U1.T5 U1.U16 U1.V12 U1.W4 U2.3 U2.6 U4.10 | length 11.6
  Top Layer w0.15: U1.U16 149.55,135.5 151.5,135.5 U1.V12 ; U1.B14 150.875,125.775 v1(150.875,125.823) ; U1.T5 U1.R4 ; L4.2 156.408,138.492 156.6,138.3 158.262,138.3 158.35,138.212 U1.AA2 ; L3.2 172.35,134.069 173.125,133.294 173.312,133.294 173.4,133.206 173.4,131.7 173.125,131.425 U4.10
3V3: C1.2 C2.2 C13.2 J5.36 J.4 L2.2 L5.2 R1.2 R2.2 R11.1 U1.B6 U1.B7 U1.C14 U1.D8 U1.E6 U1.E8 U1.E10 U1.F6 U1.F7 U1.G4 U1.H4 U1.J5 U1.R3 U1.U15 U1.V11 U2.4 U4.4 | length 14.4
  Top Layer w0.15: U1.U15 151.85,135.2 U1.V11 ; U1.C14 v1(150.888,126.438) ; U1.B7 U1.B6 156.1,125.8 156.1,127.65 ; 156.111,128.126 156.111,129.111 156.35,129.35 U1.H4 U1.G4 ; 156.4,129.4 U1.J5 ; U1.R3 158.007,133.593 v1(158.007,133.547) ; L2.2@168.975,127.2 168.975,130.775 169.156,130.956 169.581,130.956 U4.4
5V: C16.2 C17.2 C18.2 J3.A4 J3.A9 J3.B4 J3.B9 J5.40 Q1.2 R3.2 R4.2 U4.1 U4.6 U4.7 | length 24.8
  Top Layer w0.3: U4.6 169.624,130.051 169.624,129.676 169.8,129.5 171.1,129.5 ; U4.7 172.6,129.7 172.4,129.5 171.1,129.5 ; J5.40@173.73,122.04 173.73,123.17 172.9,124 ; J3.A9 176.72,127.38 176.95,127.15 177.222,127.15 177.242,127.13 J3.B4 ; J3.B4@177.53,127.15 178.824,127.15 179,126.974 179,125 178.65,124.65 177.53,124.65 176.95,124.65 176.7,124.4 176.23,124.4 175.7,124.4 175.666,124.366 175.3,124 172.9,124 ; 171.1,129.5 171.1,124.4 171.35,124.15 C16.2 172.9,124
5V_CORE: C10.2 C11.2 Q1.3 R6.2 U3.A1 U3.B1 U3.C1 U3.D1 U3.D2 | length 2.8
  Top Layer w0.15: U3.D2 U3.D1 U3.C1 U3.B1 U3.A1 165.6,131.3 165.713,131.187 165.713,130.637 C11.2
DDR_1V25: C4.2 U1.A16 U1.B17 U1.C18 U1.G17 U1.H17 U1.K17 U1.L5 U1.N5 U1.P17 U1.T17 U2.1 | length 6.7
  Top Layer w0.15: U1.C18 U1.B17 U1.A16 ; U1.G17 U1.K17 ; U1.P17 149,133.65 149,134.15 U1.T17 ; U1.L5 U1.N5
GND: C1.1 C2.1 C3.1 C4.1 C5.1 C6.2 C7.1 C8.1 C9.2 C10.1 C11.1 C12.1 C13.1 C14.1 C15.1 C16.1 C17.1 C19.1 C20.1 C21.1 C22.1 C23.1 C24.1 C25.1 C26.1 J2.4 J2.7 J2.10 J2.13 J2.16 J2.SH1 J2.SH2 J2.SH3 J2.SH4 J3.A1 J3.A12 J3.B1 J3.B12 J3.S1 J3.S2 J3.S3 J3.S4 J4.2 J5.3 J5.8 J5.13 J5.18 J5.23 J5.28 J5.33 J5.38 J.6 J.9 J.10 J.13 R5.2 R8.1 R9.1 R10.1 R12.2 R13.2 R15.1 R16.1 R17.1 R18.2 U1.A1 U1.A18 U1.A21 U1.AA1 U1.AA21 U1.B13 U1.B15 U1.B18 U1.C7 U1.C8 U1.C9 U1.C10 U1.C11 U1.C12 U1.C13 U1.C15 U1.C17 U1.D3 U1.D6 U1.D10 U1.D12 U1.D13 U1.D14 U1.D16 U1.E12 U1.E13 U1.E14 U1.E18 U1.F10 U1.F12 U1.F13 U1.F14 U1.F16 U1.F20 U1.G2 U1.G5 U1.H15 U1.J15 U1.J18 U1.K5 U1.K11 U1.K12 U1.K13 U1.L10 U1.L11 U1.L12 U1.L13 U1.M12 U1.M14 U1.M15 U1.N11 U1.N12 U1.N13 U1.N15 U1.N18 U1.P2 U1.P6 U1.P11 U1.P13 U1.P14 U1.P15 U1.R5 U1.R11 U1.R13 U1.R14 U1.R18 U1.T6 U1.T11 U1.T12 U1.T13 U1.U4 U1.U6 U1.V4 U1.V9 U1.V10 U1.W3 U1.W12 U1.W14 U1.W16 U1.W18 U2.5 U2.7 U3.A3 U3.B3 U3.C2 U3.C3 U3.E1 U4.3 U4.9 U4.13 Y1.2 Y1.4 | length 33.2
  Top Layer w0.15: v1(145.5,138.1) 145.8,137.8 U1.AA21 ; U1.N18 v1(147.95,133.25) U1.R18 ; U1.W18 v1(148.6,136.5) U1.W16 U1.W14 v1(151.2,136.5) U1.W12 v1(152.5,136.5) U1.V10 U1.V9 ; C24.1 C23.1 ; U1.P6 U1.R5 U1.T6 U1.U6 ; v1(156.098,130.998) 156.098,130.952 U1.K5 ; U1.G5 v1(156.7,129) ; U1.V4 U1.W3 ; U1.G2 158.6,128.95 v1(158.6,129) ; U1.P2 v1(158.7,133.6) ; C5.1 R15.1 ; C12.1 163.75,132.25 163.9,132.4 U3.C3 ; C11.1 164.287,130.637 164.287,131.187 164.5,131.4 U3.A3 U3.B3 U3.C3 ; U3.C2 U3.C3 ; C6.2 C9.2 ; U4.3 170.875,131.425 U4.13 171.325,130.975 U4.9 ; R10.1 174,128.3 174.58,128.88 J3.A12 177.43,128.88 J3.B1 ; J3.A1 177.43,122.88 J3.B12
  Bottom Layer w0.15: J4.2 144.2,138.4 144.3,138.5 145.1,138.5 v1(145.5,138.1)
  other v1: 149.9,128 149.9,128.7 151.4,128.7 152.9,128.7 149.9,130.5 149.9,130.9 149.9,131.5 151.2,132 152.5,132 150.3,132.9 150.1,133.8 150.9,133.9 151.9,133.9
GPIO2: J5.4 R2.1 U1.M2 | length 4.8
  Top Layer w0.15: U1.M2 158.35,131.977 158.4,132.027 158.4,132.047 v1(158.664,132.311) ; R2.1 164.7,139.312 164.788,139.4 166.022,139.4 166.11,139.488 J5.4@166.11,140.5
  Mid Layer 4 w0.1: v1(158.664,132.311) 158.726,132.311 159.1,132.685 159.1,133.5
GPIO3: J5.5 R1.1 U1.L3 | length 2.6
  Top Layer w0.15: U1.L3 157.9,131.5 157.9,131.558 v1(157.939,131.596) ; J5.5@163.57,140.5 163.644,140.426 163.644,139.556 163.9,139.3 R1.1
  Mid Layer 4 w0.1: v1(157.939,131.596) 157.996,131.596 158.3,131.9
GPIO4: J5.6 U1.M1 | length 1.8
  Top Layer w0.15: U1.M1 159,131.977 159.155,132.132 159.155,132.296 v1(159.194,132.335)
  Mid Layer 4 w0.1: v1(159.194,132.335) 159.194,132.402 159.3,132.509 159.3,133.6
GPIO5: J5.7 U1.L2 | length 0.8
  Top Layer w0.15: U1.L2 158.646,131.596 v1(158.7,131.596)
  Mid Layer 4 w0.1: v1(158.7,131.596) 158.7,131.65 158.9,131.85
GPIO6: J5.9 U1.K1 | length 3.2
  Top Layer w0.15: U1.K1 v1(159.256,130.906)
  Mid Layer 4 w0.1: v1(159.256,130.906) 159.256,130.924 159.522,131.19 159.522,133.616
GPIO7: J5.10 U1.K3 | length 5
  Top Layer w0.15: U1.K3 v1(157.95,130.9)
  Mid Layer 4 w0.1: v1(157.95,130.9) 158.3,131.25
  Bottom Layer w0.1: v1(157.95,130.9) 158.27,131.22 159.441,131.22 159.512,131.291 159.512,132.391 159.5,132.403 159.5,133.678
GPIO8: J5.11 U1.F1 | length 6.6
  Top Layer w0.15: U1.F1 159.35,127.7 v1(159.4,127.7)
  Mid Layer 4 w0.1: v1(159.4,127.7) 159.4,127.735 159.9,128.235 159.9,133.55
GPIO9: J5.12 U1.K2 | length 4.7
  Top Layer w0.15: U1.K2 v1(158.6,130.9)
  Bottom Layer w0.1: v1(158.6,130.9) 158.907,130.593 159.534,130.593 159.649,130.707 159.649,131.161 159.701,131.213 159.701,133.744 159.649,133.796
GPIO10: J5.14 U1.F2 | length 6.9
  Top Layer w0.15: U1.F2 158.7,127.7 v1(158.765,127.635)
  Mid Layer 4 w0.1: v1(158.765,127.635) 159.711,128.581 159.711,133.538
GPIO11: J5.15 U1.J2 | length 0.4
  Top Layer w0.15: U1.J2 158.6,130.25
GPIO12: J5.16 U1.H1 | length 1.5
  Top Layer w0.15: U1.H1 159,129.1 159.903,128.197
GPIO13: J5.17 U1.J4 | length 0.9
  Top Layer w0.15: 156.8,130.8 156.8,130.25 U1.J4
GPIO14: J5.19 U1.E2 | length 3.2
  Top Layer w0.15: v1(158.115,127.165) U1.E2
  Mid Layer 3 w0.15: 155.7,126 156.95,126 v1(158.115,127.165)
GPIO15: J5.20 U1.H2 | length 1.9
  Top Layer w0.15: 158,127.638 158,129 U1.H2
GPIO16: J5.21 U1.E3 | length 2.4
  Top Layer w0.15: v1(157.465,127.165) U1.E3
  Mid Layer 3 w0.15: 155.7,126.5 156.8,126.5 v1(157.465,127.165)
GPIO17: J5.22 U1.D1 | length 3.7
  Top Layer w0.15: U1.D1 159.45,126.75 v1(159.5,126.7)
  Mid Layer 4 w0.15: 159.5,123.5 v1(159.5,126.7)
GPIO18: J5.24 U1.H3 | length 3.5
  Top Layer w0.15: v1(156.905,128.2) 157,128.2 157.411,128.611 157.411,129.061 U1.H3
  Mid Layer 4 w0.15: 155.8,126.8 155.961,126.961 155.961,127.44 156.46,127.939 156.644,127.939 v1(156.905,128.2)
GPIO19: J5.25 U1.B1 | length 2.5
  Top Layer w0.15: v1(158.7,124.1) 158.7,125.15 U1.B1
  Mid Layer 3 w0.15: 157.9,123.6 158.2,123.6 v1(158.7,124.1)
GPIO20: J5.26 U1.D2 | length 3.4
  Top Layer w0.15: U1.D2 v1(158.9,126.2)
  Mid Layer 3 w0.15: 157.3,125.1 158.7,125.1 158.9,125.3 v1(158.9,126.2)
GPIO21: J5.27 U1.C2 | length 1.9
  Top Layer w0.15: 157.589,124.489 157.7,124.6 157.7,124.896 158,125.196 158,125.75 U1.C2
GPIO22: J5.29 U1.B2 | length 13.7
  Top Layer w0.15: v1(157.9,124.2) 157.9,124.277 158.061,124.438 158.061,124.92 158.35,125.209 U1.B2
  Mid Layer 3 w0.15: 146.142,123.042 147.3,124.2 v1(157.9,124.2)
GPIO23: J5.31 U1.G3 | length 6.3
  Top Layer w0.15: v1(156.6,127.6) 156.612,127.612 156.854,127.612 157.7,128.459 U1.G3
  Mid Layer 4 w0.15: 156.2,123.2 156.2,127.2 v1(156.6,127.6)
GPIO24: J5.32 U1.C3 | length 6.7
  Top Layer w0.15: J5.32@153.41,122.04 153.44,122.04 156.7,125.3 156.7,126.2 156.9,126.4 157.4,126.4 U1.C3
GPIO25: J5.34 U1.C4 | length 3.7
  Top Layer w0.15: U1.C4 157.35,125.8 157.35,123.35 157.9,122.8
GPIO26: U1.F3
GPIO27: U1.B10
HDMI_CKN: FL4.1 J2.14
HDMI_CKP: FL4.2 J2.12
HDMI_T0N: FL3.1 J2.11 | length 3.8
  Top Layer w0.15: FL3.1 176.15,134.35 176.739,134.939 176.739,136.539 176.9,136.7 J2.11
HDMI_T0P: FL3.2 J2.9 | length 3.6
  Top Layer w0.15: FL3.2 176.15,135.05 176.5,135.4 176.5,136.8 176.8,137.1 J2.9
HDMI_T1N: FL2.1 J2.8
HDMI_T1P: FL2.2 J2.6 | length 4.4
  Top Layer w0.15: FL2.2 175.587,136.613 v2(176.021,136.613)
  Mid Layer 2 w0.15: v2(176.021,136.613) 177.108,137.7 179.446,137.7
HDMI_T2N: FL1.1 J2.5 | length 2.1
  Top Layer w0.15: FL1.1 176.05,137.55 176.4,137.9 J2.5
HDMI_T2P: FL1.2 J2.3 | length 1.9
  Top Layer w0.15: FL1.2 176.05,138.25 176.1,138.3 J2.3
ID_SC: J5.2 U1.L4 | length 4.6
  Top Layer w0.15: U1.L4 v1(157.35,131.6)
  Mid Layer 3 w0.1: v1(157.35,131.6) 157.668,131.282 159.682,131.282 160.9,132.5
ID_SD: J5.1 U1.N4 | length 4.5
  Top Layer w0.15: U1.N4 157.35,132.9 157.396,132.9 v1(157.398,132.902)
  Mid Layer 3 w0.1: v1(157.398,132.902) 157.428,132.872 157.628,132.872 157.686,132.813 157.686,132.809 157.87,132.625 158.807,132.625 159.282,133.1 161.148,133.1
INT_SCL: U1.P1 U3.E2 | length 6.4
  Top Layer w0.15: U1.P1 159.25,133 163.2,133 163.8,133.6 164.509,133.6 164.9,133.209 U3.E2@164.9,133.206
INT_SDA: U1.U3 U3.D3 | length 9
  Top Layer w0.15: U1.U3 v1(157.989,134.911) ; v1(163.787,132.773) 163.813,132.8 U3.D3
  Mid Layer 3 w0.15: v1(157.989,134.911) 158.178,135.1 163.2,135.1 v1(163.6,134.7)
  Mid Layer 4 w0.15: v1(163.6,134.7) 163.6,132.961 v1(163.787,132.773)
  Bottom Layer w0.15: v1(157.989,134.911) v1@158,134.9
NetC6_1: C6.1 U1.U7 Y1.1 | length 9.9
  Top Layer w0.15: U1.U7 155.461,135.561 159.161,135.561 160.1,136.5 161.75,136.5 162.025,136.225 162.125,136.225 162.6,135.75 Y1.1 163.542,135.65 163.667,135.775 163.717,135.775 163.892,135.95 C6.1
NetC9_1: C9.1 U1.V8 Y1.3 | length 10.9
  Top Layer w0.15: U1.V8 154.739,136.139 156.039,136.139 156.761,136.861 159.461,136.861 160.113,137.513 160.363,137.513 Y1.3 161.275,137.475 161.275,137.225 161.6,136.9 C9.1
NetC15_2: C15.2 R3.1 U4.12
NetC18_1: C18.1 Q1.1 R4.1 R5.1
NetC22_2: C22.2 U1.M4
NetC23_2: C23.2 L4.1 U1.AA6 | length 2.4
  Top Layer w0.15: C23.2 L4.1 155.392,138.608 155.75,138.25 U1.AA6
NetC24_2: C24.2 L5.1 U1.W10 | length 4.5
  Top Layer w0.15: L5.1@150.789,139.119 L5.1 C24.2 151.592,138.508 152.2,137.9 152.2,137.527 152.288,137.439 152.62,137.439 152.789,137.27 152.789,137.103 153.15,136.741 U1.W10
NetC25_2: C25.2 R16.2 U1.AA20
NetC26_2: C26.2 U1.U18
NetD1_1: D1.1 R11.2
NetD1_2: D1.2 U1.D4 | length 12.3
  Top Layer w0.15: v1(156.6,126.9) 156.75,126.75 U1.D4 ; v2(163.4,123.4) 163.7,123.7 D1.2
  Mid Layer 3 w0.15: v2(157.2,122.7) 157.218,122.718 157.518,122.718 157.9,123.1 163.1,123.1 v2(163.4,123.4)
  Mid Layer 4 w0.15: v1(156.6,126.9) 156.6,123.3 v2(157.2,122.7)
NetFL1_3: FL1.3 U1.Y10 | length 24.2
  Top Layer w0.15: U1.Y10 v1(153.498,137.498)
  Bottom Layer w0.15: v1(153.498,137.498) 153.483,137.513 152.888,137.513 152.8,137.601 152.8,138.438 153.862,139.5 154.1,139.5 172.338,139.5 173.538,138.3 174,138.3
NetFL1_4: FL1.4 U1.AA10 | length 22.6
  Top Layer w0.15: v1(153.139,138.172) 153.15,138.161 U1.AA10
  Bottom Layer w0.15: v1(153.139,138.172) 153.139,138.439 153.961,139.261 172.239,139.261 174,137.5
NetFL2_3: FL2.3 U1.Y9 | length 22.7
  Top Layer w0.15: U1.Y9 154.1,137.45 154.1,137.498 v1(154.102,137.498)
  Bottom Layer w0.15: v1(154.102,137.498) 153.617,137.983 153.617,138.313 153.816,138.511 154.173,138.511 154.601,138.939 156.399,138.939 156.599,138.739 171.299,138.739 173.521,136.517
NetFL2_4: FL2.4 U1.AA9 | length 21.8
  Top Layer w0.15: U1.AA9 153.81,137.81 153.81,137.985 153.956,138.13 v1(153.956,138.172)
  Bottom Layer w0.15: v1(153.956,138.172) 153.981,138.197 154.197,138.197 154.7,138.7 156.3,138.7 156.5,138.5 171.2,138.5 173.7,136 174,136
NetFL3_3: FL3.3 U1.Y8 | length 22.2
  Top Layer w0.15: U1.Y8 v1(154.7,136.9)
  Bottom Layer w0.15: v1(154.7,136.9) 154.441,137.159 154.441,137.641 155,138.2 156.141,138.2 156.388,137.953 169.847,137.953 172.8,135 173.9,135
NetFL3_4: FL3.4 U1.AA8 | length 21.2
  Top Layer w0.15: U1.AA8 154.752,137.498 v1(154.798,137.498)
  Bottom Layer w0.15: v1(154.798,137.498) 155.2,137.9 156.103,137.9 156.289,137.714 169.686,137.714 173,134.4 173.9,134.4
NetFL4_3: FL4.3 U1.Y7 | length 20.3
  Top Layer w0.15: U1.Y7 155.1,137.123 155.177,137.046 155.177,137.023 155.408,136.792 v1(155.439,136.792)
  Bottom Layer w0.15: v1(155.439,136.792) 155.473,136.792 155.627,136.639 169.499,136.639 172.638,133.5 173.9,133.5
NetFL4_4: FL4.4 U1.AA7 | length 21.8
  Top Layer w0.15: U1.AA7 v1(155.4,137.5)
  Bottom Layer w0.15: v1(155.4,137.5) 155.1,137.2 155.1,136.576 155.276,136.4 169.4,136.4 173,132.8 173.9,132.8
NetJ3_A5: J3.A5 R9.2 | length 1.2
  Top Layer w0.15: R9.2 J3.A5@176.23,124.9
NetJ3_B5: J3.B5 R10.2 | length 4.2
  Top Layer w0.15: R10.2 175.021,125.821 v1(175.329,125.821) ; J3.B5@177.53,126.65 v1(178.162,126.65)
  Mid Layer 2 w0.15: v1(175.329,125.821) 175.35,125.8 176.656,125.8 176.787,125.931 176.81,125.931 177.529,126.65 v1(178.162,126.65)
NetJ4_1: J4.1 U1.V16 | length 5.6
  Top Layer w0.15: v1(148.8,135.9) 148.85,135.85 U1.V16
  Bottom Layer w0.15: J4.1@143.9,136.5 144.075,136.325 J4.1 145.375,136.325 145.8,135.9 v1(148.8,135.9)
NetL1_1: L1.1 U3.A2 U3.B2 | length 3.2
  Top Layer w0.15: 164.9,131.3 U3.A2 U3.B2
  Top Layer w0.25: L1.1@164.9,128.8 164.9,131.3
NetL2_1: L2.1 U4.8 | length 4.4
  Top Layer w0.15: U4.8 173.175,130.525 173.3,130.4 L2.1@173.3,128.475 ; L2.1 172.625,127.212 L2.1@173.3,127.887 ; L2.1@172.887,127.987 L2.1@173.275,128.375
NetL3_1: L3.1 U4.2 | length 3.4
  Top Layer w0.15: U4.2 169.088,131.875 169,131.963 169,133.2 169.85,134.05 L3.1
NetR6_1: R6.1 R7.1 R8.2 | length 1.6
  Top Layer w0.15: R8.2 R7.1
NetR12_1: R12.1 U1.K6
NetR13_1: R13.1 U1.K7
NetR14_2: R14.2 U1.T3 | length 3.1
  Top Layer w0.15: U1.T3 158.025,134.225 v1(158.073,134.225)
  Mid Layer 3 w0.15: v1(158.073,134.225) 158.646,134.225 158.76,134.339 159.061,134.339 159.298,134.102 v1(160.5,134.102)
NetR17_2: R17.2 U1.Y6
NetR18_1: R18.1 U1.M18
NetU1_N3: U1.N3 U1.N6
PLL_VDD: C7.2 C8.2 U1.U5 U1.V6 U1.W6 | length 5.4
  Top Layer w0.15: U1.W6 156.062,136.812 156.062,137.221 156.341,137.5 158.551,137.5 158.639,137.588 158.639,138.039 159.184,138.584 C7.2
PWR_1: C20.2 C21.2 U1.A14 U1.F17 U1.M3 U1.M17 | length 12.6
  Top Layer w0.1: v1(157.502,132.222) 157.502,132.185 157.7,131.987 U1.M3
  Top Layer w0.15: U1.M17 149.2,131.35 149.2,128.8 148.619,128.219 148.619,128.069 U1.F17 148.6,126.6 149.2,126 149.2,125.5 149.9,124.8 U1.A14
  Mid Layer 3 w0.15: v1(157.502,132.222) 157.789,131.935 159.835,131.935 160.5,132.6
RUN: C19.2 R7.2 U1.E21 | length 31.4
  Top Layer w0.1: v1(145.7,127.7) U1.E21 ; v1(167.1,137.375) R7.2
  Top Layer w0.15: R7.2 167.1,138.312 167.188,138.4 167.812,138.4 167.9,138.488 C19.2
  Mid Layer 3 w0.1: v1(145.7,127.7) 149.756,127.7 149.77,127.686 150.03,127.686 150.73,128.386 153.03,128.386 153.344,128.7 153.556,128.7 153.87,129.014 154.358,129.014 155.93,130.586 159.38,130.586 160.394,131.6 v1(166.9,131.6)
  Mid Layer 4 w0.1: v1(166.9,131.6) 166.9,137.2 167.075,137.375 v1(167.1,137.375)
SD_CLK: J.5 R14.1 R15.2 | length 18.6
  Top Layer w0.15: v1(161.5,134.5) R15.2
  Mid Layer 3 w0.15: v1(155.38,134.878) 157.248,134.878 157.554,134.572 158.655,134.572 158.661,134.578 159.16,134.578 159.166,134.572 161.312,134.572 161.346,134.538 161.462,134.538 v1(161.5,134.5)
  Bottom Layer w0.15: 143.961,134.878 v1(155.38,134.878)
SD_CMD: J.3 U1.P3 | length 15.4
  Top Layer w0.15: U1.P3 158,132.95 v1(158,132.939)
  Bottom Layer w0.15: 143.688,132.5 150.541,132.5 151.541,133.5 157.439,133.5 v1(158,132.939)
SD_DAT0: J.7 U1.R2 | length 15.4
  Top Layer w0.15: U1.R2 158.369,133.919 158.493,133.919 158.604,134.03 158.87,134.03 v1(158.9,134)
  Bottom Layer w0.15: 144.3,134.3 155.7,134.3 156.114,133.886 158.507,133.886 158.56,133.939 158.712,133.939 158.735,133.962 158.862,133.962 v1(158.9,134)
SD_DAT1: J.8 U1.T4 | length 13.9
  Top Layer w0.15: U1.T4 157.361,134.239 v1(157.408,134.239)
  Bottom Layer w0.15: 144.171,134.509 144.201,134.539 157.108,134.539 v1(157.408,134.239)
SD_DAT2: J.1 U1.N2 | length 16.5
  Top Layer w0.15: U1.N2 158.35,132.627 158.389,132.666 158.389,132.685 v1(158.666,132.963)
  Bottom Layer w0.15: 143.44,132.022 150.739,132.022 151.739,133.022 156.299,133.022 156.758,132.563 158.266,132.563 v1(158.666,132.963)
SD_DAT3: J.2 U1.P4 | length 14.1
  Top Layer w0.15: v1(156.8,133) U1.P4
  Bottom Layer w0.15: 143.539,132.261 150.64,132.261 151.64,133.261 156.485,133.261 156.746,133 v1(156.8,133)
USB_DN: J3.A7 J3.B7 U1.AA19 | length 38
  Top Layer w0.15: U1.AA19 v1(147.6,138.1) ; v1(175.6,126.4) 176.23,126.4 v1(176.8,126.4) ; v1(176.927,125.592) 176.956,125.621 177.501,125.621 J3.B7@177.53,125.65
  Bottom Layer w0.15: v1(147.6,138.1) 148.9,138.1 151.361,135.639 169.299,135.639 174.7,130.238 174.7,126.7 175,126.4 v1(175.6,126.4) ; v1(176.8,126.4) 176.8,125.774 176.927,125.646 v1(176.927,125.592)
USB_DP: J3.A6 J3.B6 U1.Y19 | length 38.2
  Top Layer w0.15: U1.Y19 147.6,137.45 147.6,137.498 v1(147.602,137.498) ; v1(175.566,125.35) 175.601,125.385 J3.A6@176.065,125.385 ; J3.A6@176.23,125.4 176.43,125.4 176.589,125.559 176.589,125.733 176.82,125.964 177.167,125.964 177.255,126.052 177.255,126.075 177.33,126.15 J3.B6@177.53,126.15
  Bottom Layer w0.15: v1(147.602,137.498) 149.102,137.498 151.2,135.4 169.2,135.4 174.461,130.139 174.461,125.939 175.05,125.35 v1(175.566,125.35)
VDD_CORE: C12.2 L1.2 U1.F8 U1.F9 U1.H9 U1.H10 U1.H11 U1.H13 U1.H14 U1.J9 U1.J10 U1.J11 U1.J13 U1.J14 U1.K10 U1.K14 U1.L14 U1.M9 U1.M10 U1.N9 U1.P9 U1.P10 U1.R10 U3.E3 | length 14.4
  Top Layer w0.15: v1(164,133.2) 164.1,133.2 U3.E3
  Top Layer w0.3: L1.2@162.73,128.915 C12.2@162.73,130.75
  Mid Layer 2 w0.15: 154.1,130.5 159.329,130.5 160.429,131.6 164.038,131.6 164.126,131.688 164.126,132.914 164.038,133.001 164.038,133.162 v1(164,133.2)
  other v1: 161.4,128.1 161.4,128.6 154,128.7 161.4,129.1 151.8,129.4 161.4,129.6 150.9,129.7 152.8,129.7 153.5,129.7 151.8,130 161.4,130.1 153.8,130.6 161.4,130.6 161.4,131.1 153.8,131.3 153.2,132.6 153.6,133.9
pads on no net: J2.1 J2.2 J2.15 J2.17 J2.18 J2.19 J3.A2 J3.A3 J3.A8 J3.A10 J3.A11 J3.B2 J3.B3 J3.B8 J3.B10 J3.B11 J5.30 J5.35 J5.37 J5.39 J.11 J.12 U1.A2 U1.A4 U1.A6 U1.A8 U1.A10 U1.A12 U1.A19 U1.A20 U1.AA3 U1.AA4 U1.AA5 U1.AA11 U1.AA12 U1.AA13 U1.AA14 U1.AA15 U1.AA16 U1.AA17 U1.AA18 U1.B3 U1.B4 U1.B5 U1.B8 U1.B9 U1.B11 U1.B12 U1.B19 U1.B20 U1.B21 U1.C5 U1.C6 U1.C19 U1.C20 U1.C21 U1.D19 U1.D20 U1.E4 U1.E19 U1.E20 U1.F5 U1.F11 U1.F19 U1.G6 U1.G7 U1.G19 U1.G20 U1.G21 U1.H6 U1.H7 U1.H19 U1.H20 U1.J6 U1.J7 U1.J19 U1.J20 U1.J21 U1.K19 U1.K20 U1.L6 U1.L7 U1.L19 U1.L20 U1.L21 U1.M6 U1.M7 U1.M19 U1.M20 U1.N7 U1.N17 U1.N19 U1.N20 U1.N21 U1.P19 U1.P20 U1.R6 U1.R7 U1.R17 U1.R19 U1.R20 U1.R21 U1.T1 U1.T2 U1.T16 U1.T19 U1.T20 U1.U1 U1.U2 U1.U17 U1.U19 U1.U20 U1.U21 U1.V1 U1.V2 U1.V13 U1.V14 U1.V15 U1.V18 U1.V20 U1.W1 U1.W2 U1.W8 U1.W19 U1.W20 U1.W21 U1.Y1 U1.Y2 U1.Y3 U1.Y4 U1.Y5 U1.Y11 U1.Y12 U1.Y13 U1.Y14 U1.Y15 U1.Y16 U1.Y17 U1.Y18 U1.Y20 U1.Y21 U2.2 U4.5 U4.11

## Polygon pours and split planes (outlines as drawn)
GND on Mid Layer 1 "NONET_L02_P000" (solid, shelved, pour order 0): 123.9,141.8 123.9,120.8 183.9,120.8 183.9,141.8
GND on Top Layer "GND_L01_P002" (solid, pour order 2): 150.9,125.2 151.5,125.2 151.5,125.8 155.4,125.8 156,125.8 156,127.1 155.4,127.1 155.4,126.4 153.4,126.4 153.4,127 152.8,127 152.8,127.7 153.5,127.7 153.5,128.5 153,129 150.2,129 150.2,131.7 150.9,131.7 150.9,130.4 152.9,130.4 152.9,131 153.4,131 153.4,131.6 152.8,131.6 152.8,134.8 150.9,134.8 150.9,134.3 150.3,134.3 149.6,133.6 149.6,128.9 149,128.3 149,126.5 149.5,126.5 149.7,126.3 149.7,125.3 149.8,125.2 150.2,125.2 150.2,126.5 150.9,126.5
3V3 on Top Layer "3V3_L01_P004" (solid, pour order 4): 152.8,127.7 152.8,127 153.4,127 153.4,126.4 155.4,126.4 155.4,127.1 156.2,127.1 156.2,128.4 154.9,128.4 154.8,128.3 154.8,127.7
VDD_CORE on Top Layer "VDD_CORE_L01_P005" (solid, pour order 5): 163.7,131.4 163.7,127.8 161.1,127.8 161.1,131.4
VDD_CORE on Top Layer "VDD_CORE_L01_P003" (solid, pour order 3): 150.9,130.4 152.9,130.4 152.9,131 153.4,131 153.4,131.6 152.8,131.6 152.8,134.3 154.2,134.3 154.2,128.9 154.8,128.3 154.8,127.7 153.5,127.7 153.5,128.5 153,129 150.2,129 150.2,131.7 150.9,131.7
VDD_CORE on Mid Layer 2 "VDD_CORE_L03_P001" (solid, pour order 1): 154.2,130.6 154.5,130.3 159.4,130.3 160.5,131.4 162,131.4 162,127.8 159.9,127.8 159.3,128.4 153.7,128.4 153.1,129 150.3,129 150.3,130.5 150.4,130.6 152.9,130.6 152.9,133.4 153.6,134.1 154.2,134.1

## Silkscreen, mask and mechanical layers (free items; w line width, h text height)
Mechanical 1:
  lines w0.2: 123.9,123.8 174.9,123.8 ; 123.9,138.8 174.9,138.8 ; 174.9,120.8 183.9,120.8 183.9,141.8 174.9,141.8 ; 174.9,120.8 174.9,141.8 ; 174.9,120.8 123.9,120.8 123.9,141.8 174.9,141.8

## Text inside footprints (layer, text, board x,y; h text height)
J2: Mechanical 13 "PCB EDGE" at 183.75,141.9 h0.61 r90